# Altium PCB 海关全向控制器数传转接板.PcbDoc
Units mil, origin at the board's own origin, x right, y up, seen from the top; angles counter-clockwise.
Board outline 984.25 x 2362.2 mil, 2 copper layers (Top Layer, Bottom Layer), stack 65.792 mil thick; 16 components, 13 nets, 53 pads, 6 vias.
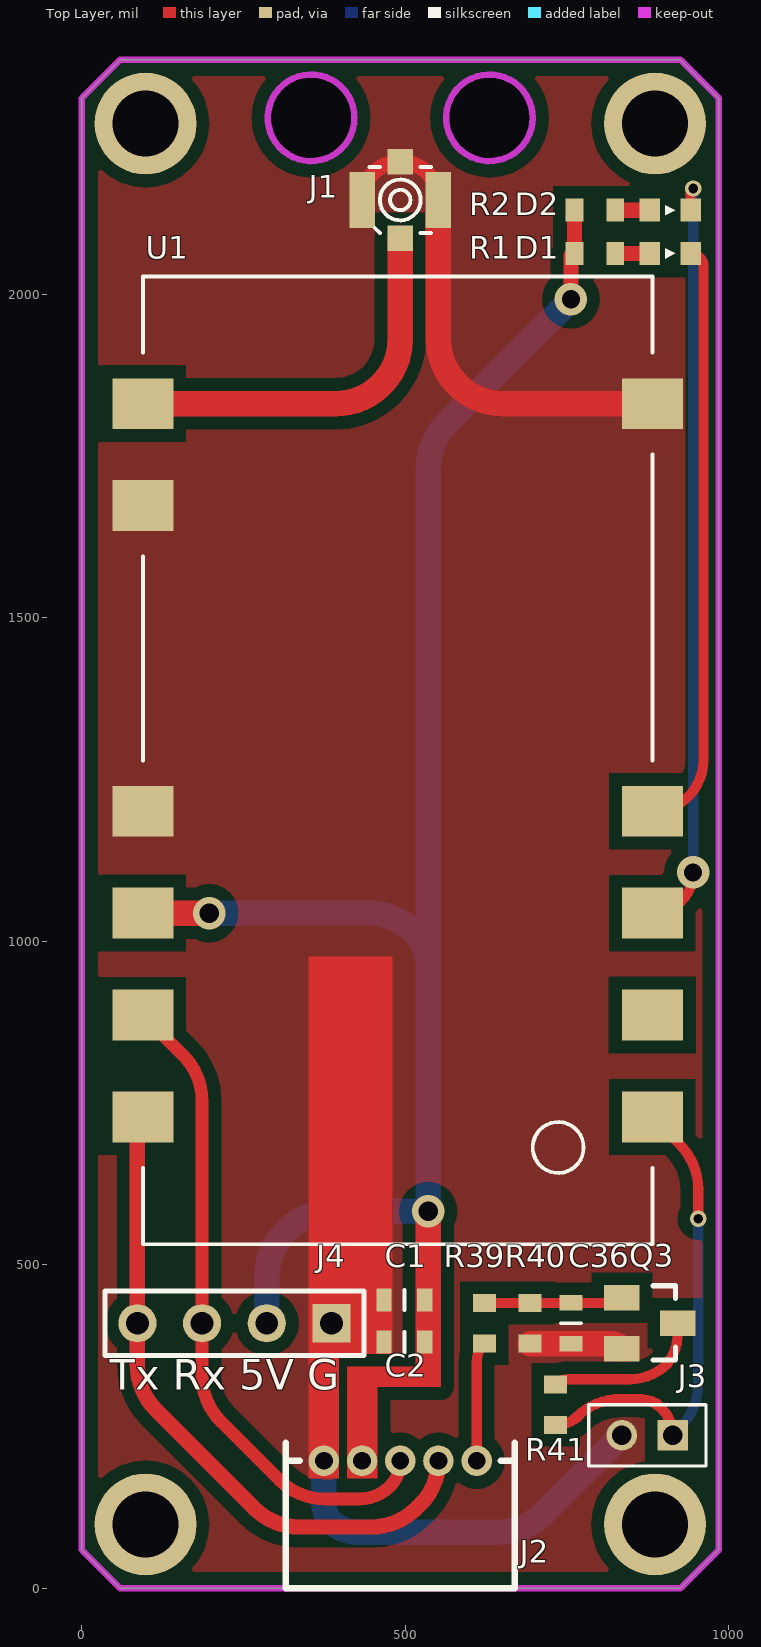
[diagram p0: Top Layer view]
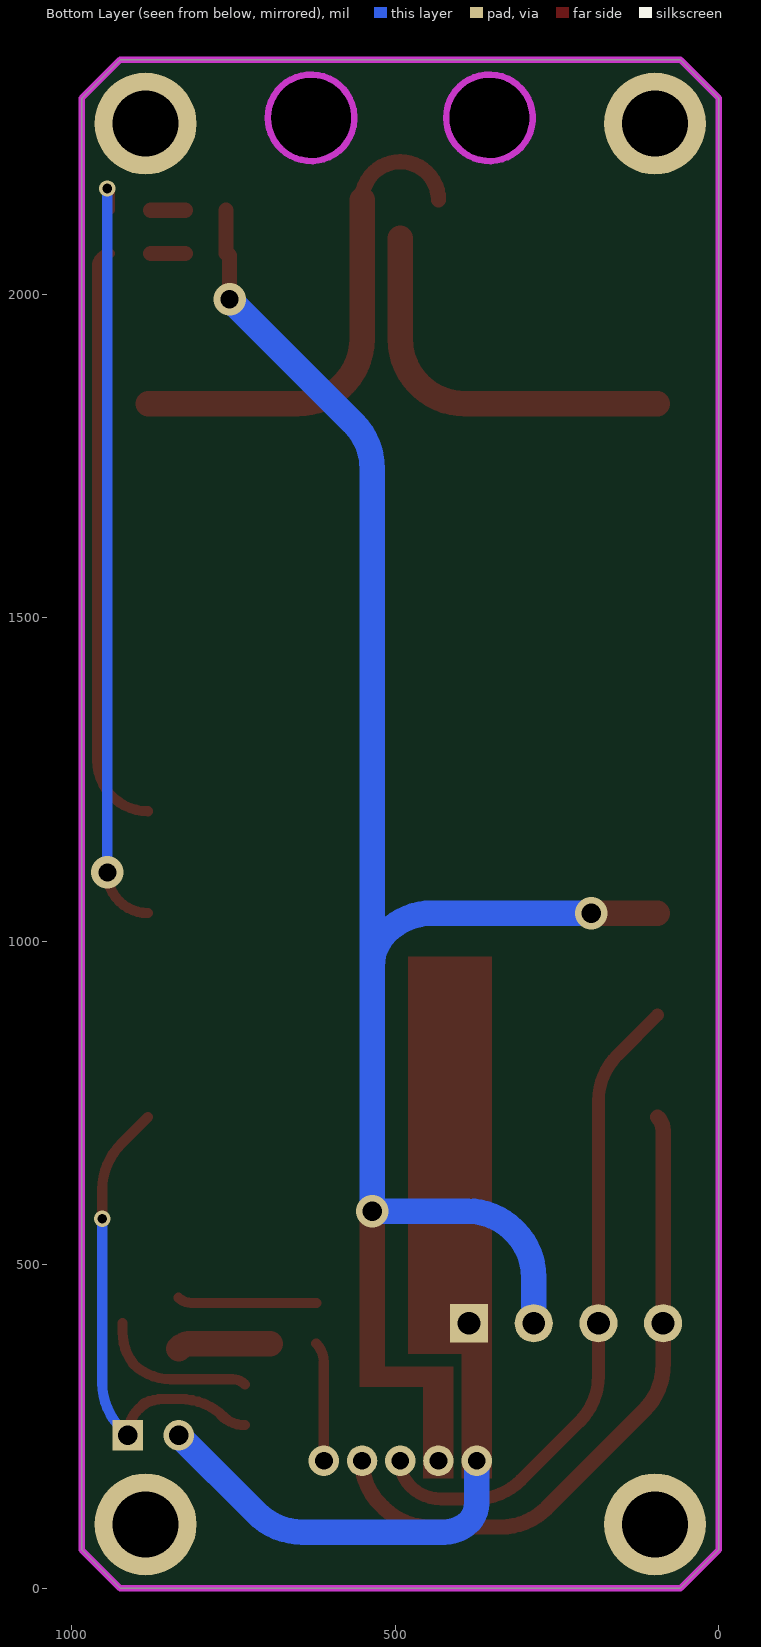
[diagram p1: Bottom Layer view, seen from below]
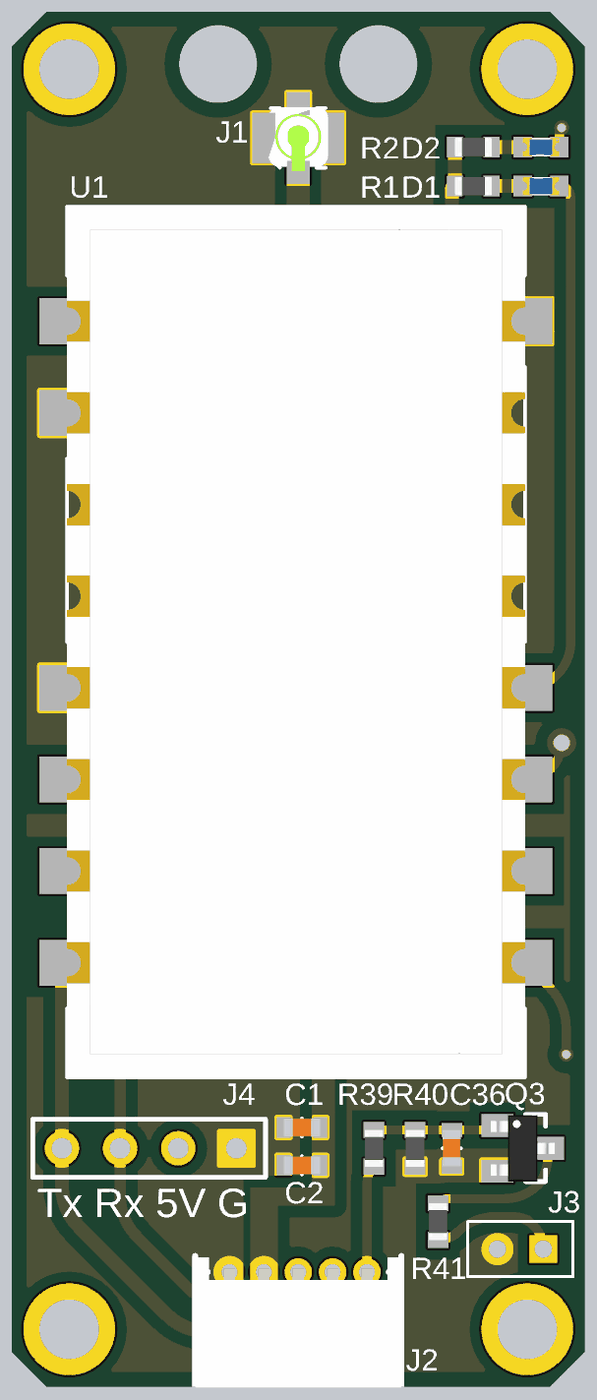
[diagram p2: 3D render of the assembled board from above, using the file's embedded part models]

## Layer stack, top to bottom
Top Solder: solder mask 0.4, Solder Resist, Dk 3.5
Top Layer: signal copper 1.4
Dielectric 1: dielectric 62.9921, FR-4, Dk 4.8
Bottom Layer: signal copper 1.4
Bottom Solder: solder mask 0.4, Solder Resist, Dk 3.5

## Board outline
0,59.06 59.06,0 925.2,0 984.25,59.06 984.25,2303.15 925.2,2362.2 59.06,2362.2 0,2303.15
cut-out: 287.4,2272.64 ccw(c354.33,2272.64) 354.33,2205.71 ccw(c354.33,2272.64) 421.26,2272.64 ccw(c354.33,2272.64) 354.33,2339.57 ccw(c354.33,2272.64)
cut-out: 562.99,2272.64 ccw(c629.92,2272.64) 629.92,2205.71 ccw(c629.92,2272.64) 696.85,2272.64 ccw(c629.92,2272.64) 629.92,2339.57 ccw(c629.92,2272.64)

## Design rules (kind name [scope] priority, off if disabled: settings)
Clearance [All] p1: gap=6
ComponentClearance [All] p1: gap=0 collisioncheckmode=3 verticalgap=0 showdistances=FALSE
Height [All] p1: minheight=0 maxheight=2000 prefheight=500
HoleSize [All] p1: absolutevalues=TRUE maxlimit=200 minlimit=1 maxpercent=80.000 minpercent=20.000
HoleToHoleClearance [All] p1: gap=6 allowstackedmicrovias=TRUE
MinimumSolderMaskSliver [All] p1: minsoldermaskwidth=0
PlaneConnect [All] p1: planeconnectstyle=Direct reliefexpansion=20 reliefentries=4 reliefconductorwidth=10 reliefairgap=10
PolygonConnect [All] p1: connectstyle=Direct reliefconductorwidth=10 reliefentries=4 polygonreliefangle="90 Angle" airgapwidth=10
RoutingVias [All] p1: holewidth=28 width=50 viastyle="Through Hole" minholewidth=8 minwidth=12 maxholewidth=200 maxwidth=300
SilkToSilkClearance [All] p1: silktosilkclearance=0
SilkToSolderMaskClearance [IsPad] p1: minsilkscreentomaskgap=0 clearancetoexposedcopper=TRUE
SolderMaskExpansion [All] p1: expansion=4
Width [All] p1: maxlimit=157.48 minlimit=10 preferedwidth=10
21 further rules are at their usual default settings.

## Components (designator, comment, footprint, x,y, rotation, side; value= is the part's Value field where it differs from the comment)
C1 "10uF" C0603 498.43,445.2 r0 top
C2 "0.1uF" C0603 498.43,380.2 r0 top
C36 "0.1uF" C0603 755.91,409.45 r90 top
D1 "LED" LED0603 909.45,2062.99 r0 top
D2 "LED" LED0603 909.45,2129.92 r0 top
J1 "ANT-ipex" IPEX 492.13,2145.67 r0 top
J2 "Jack 1x5" ZH-5AWD 492.13,196.85 r0 top
J3 "Jack 1x2" Jk1*2-2.0 874.02,236.22 r180 top
J4 "Jack 1x4" HDR1X4 385.83,409.45 r180 top
Q3 "S8050" SOT-23 877.95,409.45 r270 top
R1 "1K" R0603 792.91,2062.99 r0 top
R2 "1K" R0603 792.91,2129.92 r0 top
R39 "1K" R0603 622.05,409.45 r90 top
R40 "10K" R0603 692.91,409.45 r270 top
R41 "0R" R0603 732.28,283.46 r90 top
U1 "SV650" SV650 488.19,1279.53 r0 top

## Footprints (in the part's own frame and the unit in brackets; to place one, negate y for a bottom-side part, rotate by r counter-clockwise, add the part's x,y. Pads: shape width x height; smd on the part's side, far side on the other; paste and mask are expansions set on the pad)
C0603 [mm]
  rect 0.6x0.9 smd: 1(-0.8,0) 2(0.8,0)
  silkscreen extent 0,-0.4 0,0.4, body extent -0.8,-0.4 0.8,0.4, height 0.5
HDR1X4 [mm] "Connector; Header; 4 Position"
  rect 1.5x1.5 hole 0.9: 1(0,0)
  round 1.5 hole 0.9: 2(2.54,0) 3(5.08,0) 4(7.62,0)
  silkscreen extent -1.27,-1.27 8.89,1.27
IPEX [mm]
  rect 1x1 smd: 1(0,-1.5) 2(0,1.5)
  rect 1x2.2 smd: 2(-1.5,0) 2(1.5,0)
  silkscreen extent -1.2,-1.3 1.2,1.3, body extent -1.45,-1.45 1.45,1.45, height 0.9
Jk1*2-2.0 [mm] "2P，直插，2.0mm间距，排母"
  rect 1.2x1.2 hole 0.762: 1(-1,0)
  round 1.2 hole 0.762: 2(1,0)
  silkscreen extent -2.3,-1.2 2.3,1.2
LED0603 [mm]
  rect 0.8x0.9 smd: 1(-0.8,0) 2(0.8,0)
  silkscreen extent -0.2,-0.2 0.2,0.2, body extent -0.8,-0.4 0.8,0.4, height 0.6
R0603 [mm]
  rect 0.7x0.9 smd: 1(-0.8,0) 2(0.8,0)
  body extent -0.8,-0.4 0.8,0.4, height 0.37
SOT-23 [mm]
  rect 1x1.4 smd: 1(-1,-1.1) 2(1,-1.1) 3(0,1.1)
  silkscreen extent -1.47,0.13 1.45,1, body extent -1.45,-1.4 1.45,1.4, height 1.3
SV650 [mm]
  rect 2.4x2 smd: 1(-10,14) 2(-10,10) 5(-10,-2) 6(-10,-6) 7(-10,-10) 8(-10,-14) 9(10,-14) 10(10,-10) 11(10,-6) 12(10,-2) 16(10,14)
  silkscreen extent -10,-19 10,19, body extent -10,-19 10,19, height 4
ZH-5AWD [mm] "1.5mm，5P，卧插"
  round 1.2 hole 0.7: 1(-3,0) 2(-1.5,0) 3(0,0) 4(1.5,0) 5(3,0)
  silkscreen extent -4.5,-5 4.5,0.7, body extent -4.5,-5.05 4.5,0.65, height 3.95

## Part data
C1 C2: library part "Cap Semi"
C36: library part CAP, "CAP"
J2 J3 J4: "插座"
Q3: library part NPN, "NPN General Purpose Amplifier"
R1 R2 R39 R40 R41: library part Res, "Resistor"

## Free pads (board coordinates)
  round 157.48 hole 102.36: ""(98.43,98.43) ""(98.43,2263.78) ""(885.83,98.43) ""(885.83,2263.78)

## Via types
v1: diameter 50, hole 28, Top Layer to Bottom Layer, tented both sides, 2 vias
v2: diameter 25, hole 15, Top Layer to Bottom Layer, tented both sides, 2 vias
v3: diameter 50, hole 30, Top Layer to Bottom Layer, tented both sides, 2 vias

## Nets (pads, with @x,y where several pads share a name; then routed paths per layer and width w, separated by ;. In a path a pad name is that pad's centre, name@x,y a point inside that pad or via, vN(x,y) a via of type N, cw(c..) or ccw(c..) an arc to the next point about the centre after c; other vN are vias at no path point)
+5V: C1.2 C2.2 J2.2 J4.2 R1.1 R2.1 U1.6 | length 2501.7
  Top Layer w23.62: v1(755.91,1992.13) 755.91,2057.48 cw(c761.42,2057.48) R1.1 R2.1
  Top Layer w39.37: U1.6 v3(196.85,1043.31)
  Bottom Layer w39.37: v3(196.85,1043.31) 442.83,1043.31 cw(c442.83,943.31) 513.54,1014.02 cw(c460.69,961.17) 535.43,961.17 ; J4.2 285.83,480.63 cw(c385.83,480.63) 315.12,551.34 317.17,553.39 cw(c387.88,482.68) 387.88,582.68 v3(535.43,582.68) 535.43,961.17 ; v1(755.91,1992.13) 564.72,1800.94 ccw(c635.43,1730.23) 535.43,1730.23 535.43,961.17
DIG_RX: J2.3 J4.3 U1.7 | length 1025.2
  Top Layer w19.68: U1.7 156.54,823.78 cw(c85.83,753.07) 185.83,753.07 J4.3 185.83,328.04 ccw(c285.83,328.04) 215.12,257.32 305.36,167.08 ccw(c376.07,237.8) 376.07,137.8 428.85,137.8 ccw(c428.85,205) 476.38,157.48 ccw(c438.36,195.5) 492.13,195.5 J2.3
DIG_SET: J2.5 R39.1 | length 184.3
  Top Layer w15.75: J2.5 610.24,349.44 cw(c650.56,349.44) R39.1
DIG_TX: J2.4 J4.4 U1.8 | length 1027.3
  Top Layer w23.62: U1.8 ccw(c115.4,707.44) 85.83,707.44 J4.4 85.83,345.36 ccw(c185.83,345.36) 115.12,274.65 265.99,123.78 ccw(c336.7,194.49) 336.7,94.49 446.77,94.49 ccw(c446.77,194.49) 517.48,123.78 523.34,129.64 ccw(c456.13,196.85) J2.4
GND: C1.1 C2.1 C36.1 J1.2 J2.1 J3.2 J4.1 Q3.2 R40.2 U1.2 U1.5 U1.16 | length 1540.5
  Top Layer w23.62: J1.2@433.07,2145.67 cw(c492.13,2145.67) 492.13,2204.72 cw(c492.13,2145.67) J1.2@551.18,2145.67
  Top Layer w39.37: J1.2@551.18,2145.67 551.18,1930.71 ccw(c651.18,1930.71) 651.18,1830.71 U1.16 ; R40.2 C36.1 815.64,377.95 cw(c815.64,351.07) Q3.2
  Bottom Layer w39.37: J2.1 374.02,130.88 ccw(c414.34,130.88) 385.83,102.36 ccw(c423.85,140.38) 423.85,86.61 643.62,86.61 ccw(c643.62,186.61) 714.33,115.9 J3.2
NetC36_2: C36.2 Q3.1 R39.2 R40.1 | length 214.7
  Top Layer w15.75: R39.2 R40.1 C36.2 815.64,440.94 ccw(c815.64,467.83) Q3.1
NetD1_1: D1.1 R1.2 | length 53.5
  Top Layer w23.62: R1.2 D1.1
NetD1_2: D1.2 U1.12 | length 918.4
  Top Layer w15.75: U1.12 ccw(c881.89,1279.53) 960.63,1279.53 960.63,2043.31 ccw(c940.94,2043.31) D1.2
NetD2_1: D2.1 R2.2 | length 53.5
  Top Layer w23.62: R2.2 D2.1
NetD2_2: D2.2 U1.11 | length 1191.6
  Top Layer w15.75: U1.11 ccw(c881.89,1106.3) v1(944.88,1106.3) ; D2.2 940.94,2159.35 cw(c944.88,2159.35) v2(944.88,2163.29)
  Bottom Layer w15.75: v1(944.88,1106.3) v2(944.88,2163.29)
NetJ1_1: J1.1 U1.1 | length 610.6
  Top Layer w39.37: U1.1 392.13,1830.71 ccw(c392.13,1930.71) 492.13,1930.71 J1.1
NetJ3_1: J3.1 R41.1 U1.9 | length 857.9
  Top Layer w15.75: R41.1 ccw(c732.28,303.78) 756.09,257.76 ; 768.92,267.14 cw(c732.28,303.78) 756.09,257.76 ; U1.9 923.47,686.77 cw(c852.76,616.06) 952.76,616.06 v2(952.76,570.87) ; 756.09,257.76 ccw(c735.27,292.29) 763.78,263.78 cw(c832.7,194.85) 832.7,292.33 857.75,292.33 ; 857.75,292.33 cw(c857.75,218.06) 865.87,291.88 ; 857.75,292.33 859,292.33 cw(c859,239.17) 865.87,291.88 ; 865.87,291.88 cw(c857.75,218.06) 887.05,286.31 896.59,276.76 ; 865.87,291.88 cw(c859,239.17) 896.59,276.76 ; 896.59,276.76 cw(c856.06,236.22) J3.1 ccw(c856.06,236.22) 910.26,254.88 ccw(c856.06,236.22) 896.59,276.76
  Bottom Layer w15.75: J3.1 923.47,246.3 ccw(c852.76,317.01) 952.76,317.01 v2(952.76,570.87)
NetQ3_3: Q3.3 R41.2 | length 247.3
  Top Layer w15.75: R41.2 cw(c751.29,295.95) 751.29,322.83 846.76,322.83 ccw(c846.76,405.06) 904.9,346.92 ccw(c840.61,395.61) 921.26,395.61 Q3.3
pads on no net: U1.10

## Polygon pours and split planes (outlines as drawn)
GND on Top Layer "Keep-Out Layer-No Net" (solid, remove dead copper, pour order 3): 0,2362.2 984.25,2362.2 984.25,0 0,0

## Keep-outs
Keep-Out Layer:
  circle w10: c354.33,2272.64 r66.93
  circle w10: c629.92,2272.64 r66.93
  lines w10: 0,59.06 0,2303.15 59.06,2362.2 925.2,2362.2 984.25,2303.15 984.25,59.06 925.2,0 59.06,0 0,59.06

## Other copper
Top Layer:
  rectangle net GND: 350.39,362.2 480.31,976.38
  rectangle net GND: 350.39,169.29 397.64,456.69
  rectangle net +5V: 515.75,311.02 555.12,598.43
  rectangle net +5V: 409.45,169.29 456.69,342.52
  rectangle net +5V: 440.94,311.02 551.18,342.52

## Silkscreen, mask and mechanical layers (free items; w line width, h text height)
Top Overlay:
  text "Tx Rx 5V G" at 43.31,291.34 h80